# Altium PCB Drude.PcbDoc (part 1 of 2)
Units mil, origin at the board's own origin, x right, y up, seen from the top; angles counter-clockwise.
Board outline 1811.02 x 2874.02 mil, 4 copper layers (Top Layer, GND, Supply, Bottom Layer), stack 59.85 mil thick; 137 components, 118 nets, 574 pads, 296 vias.
Unrouted connection lines stored in the file: 8.
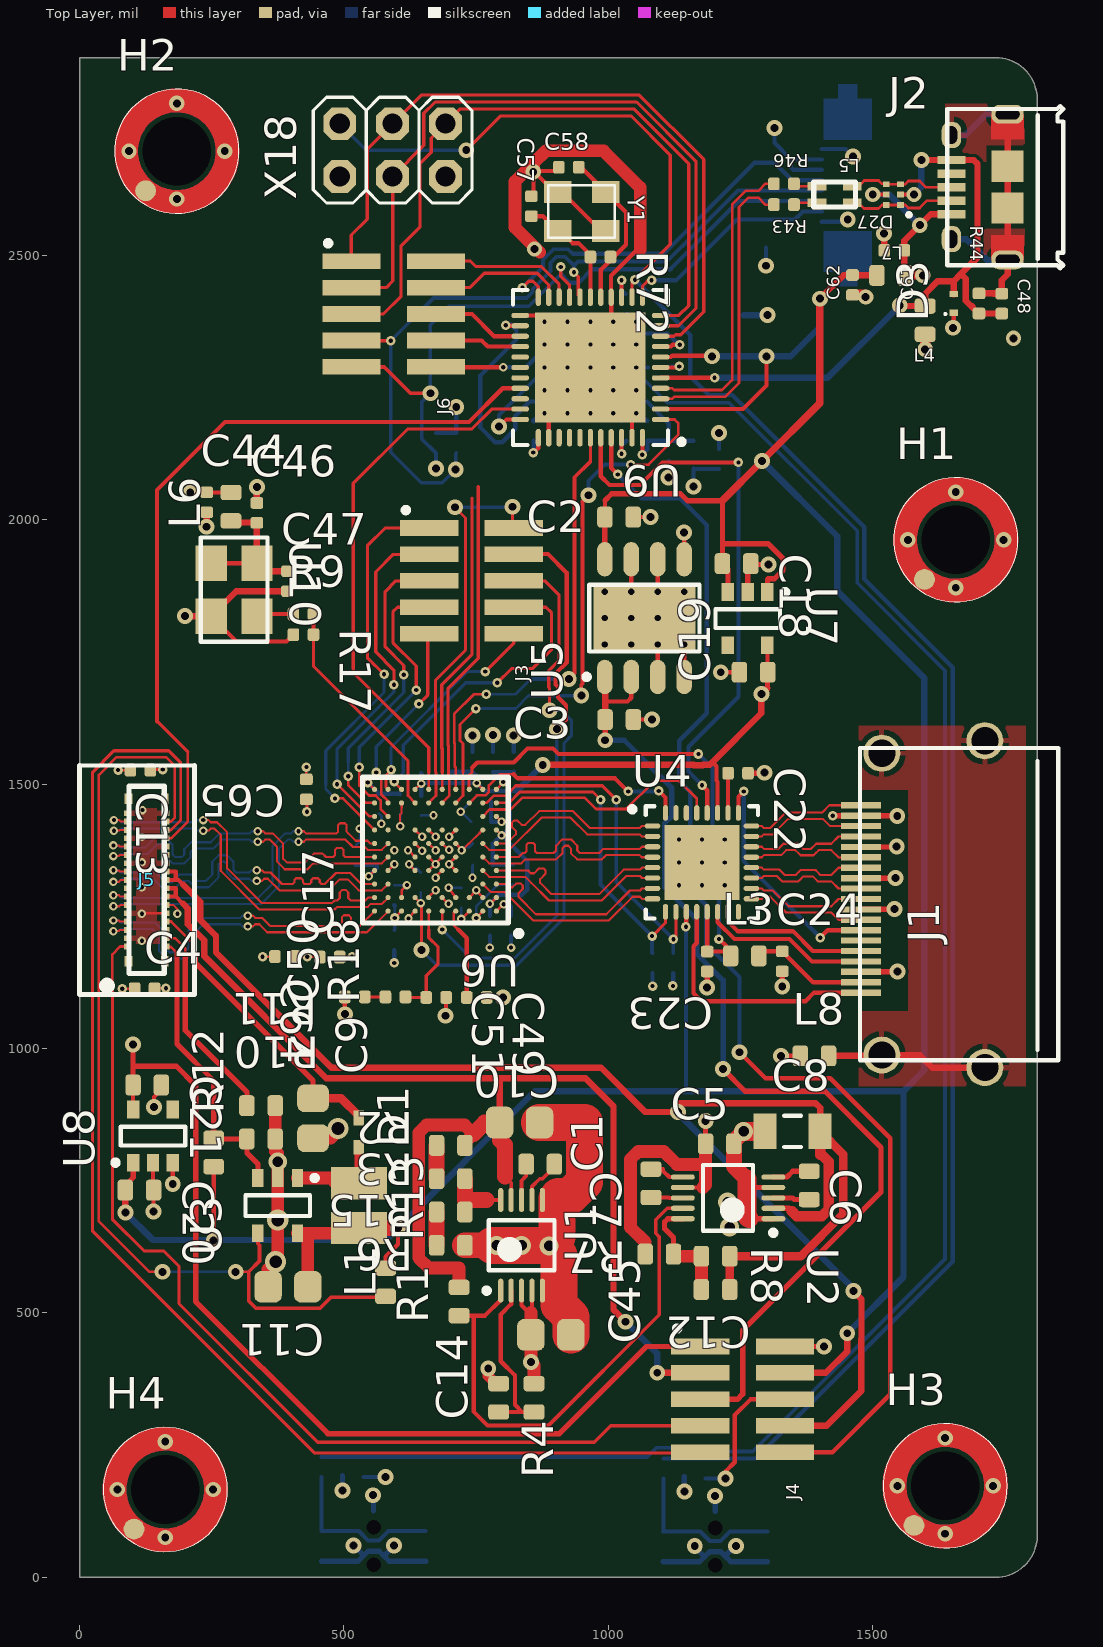
[diagram p0: Top Layer view]
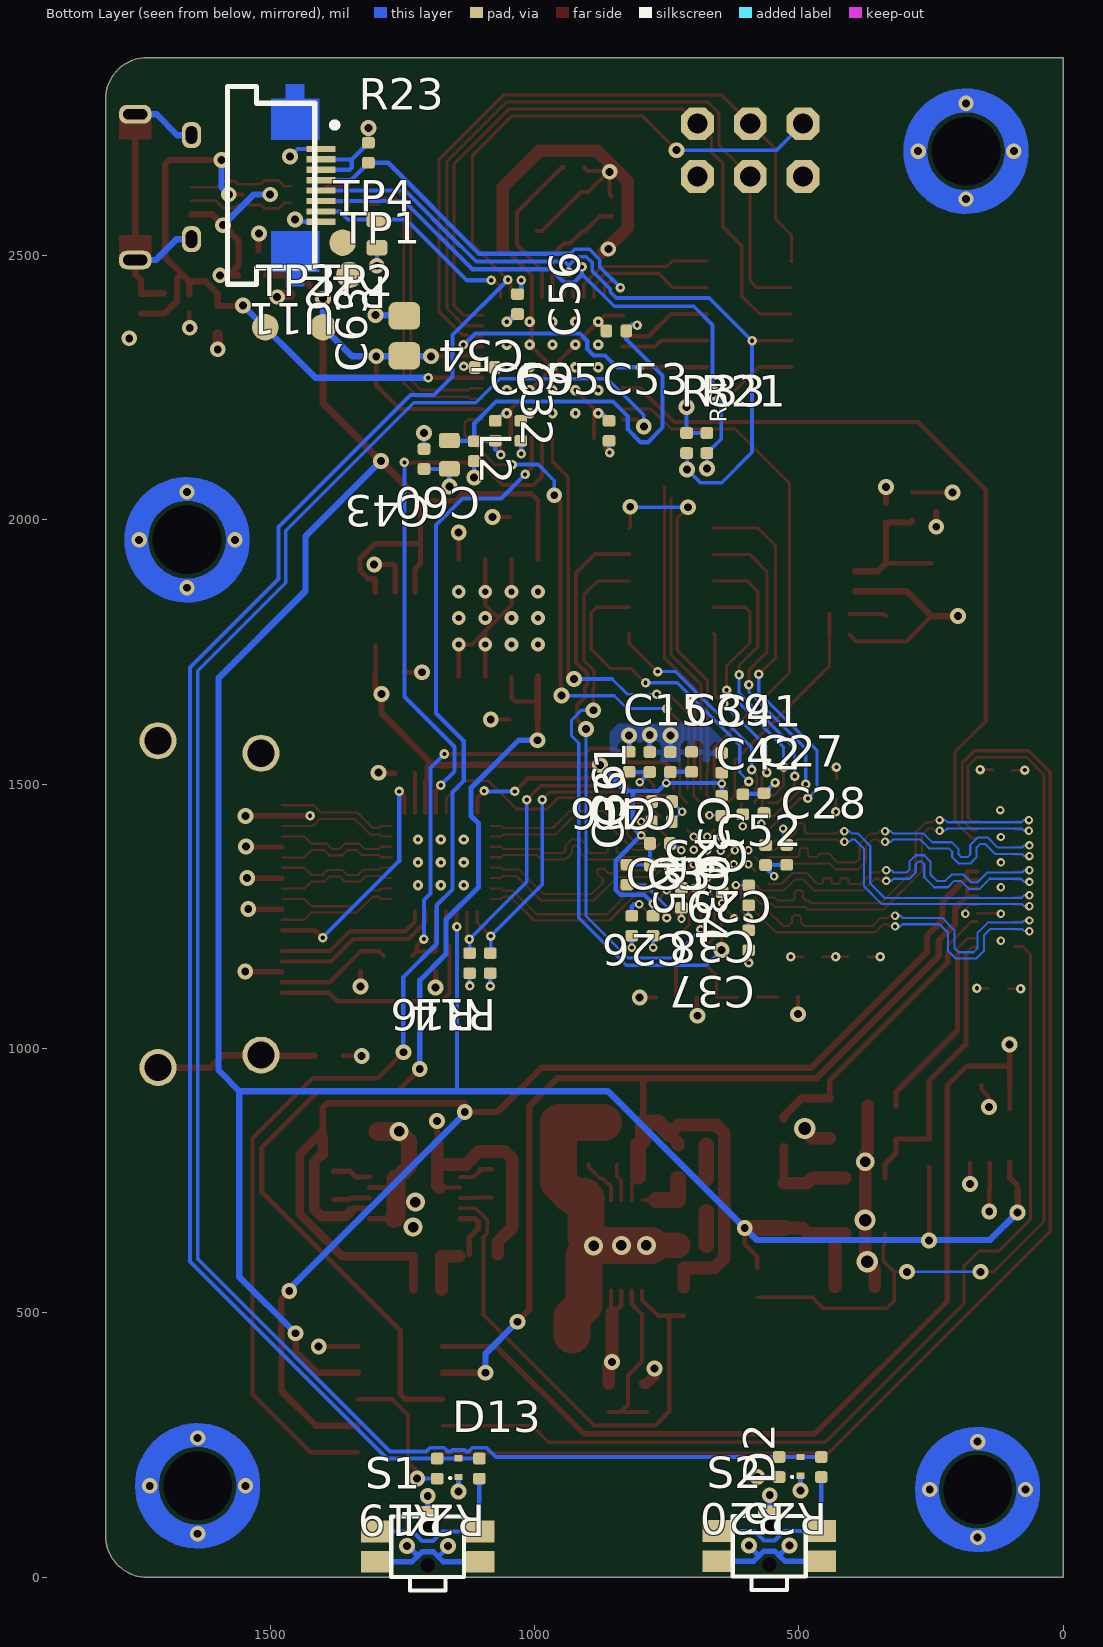
[diagram p1: Bottom Layer view, seen from below]
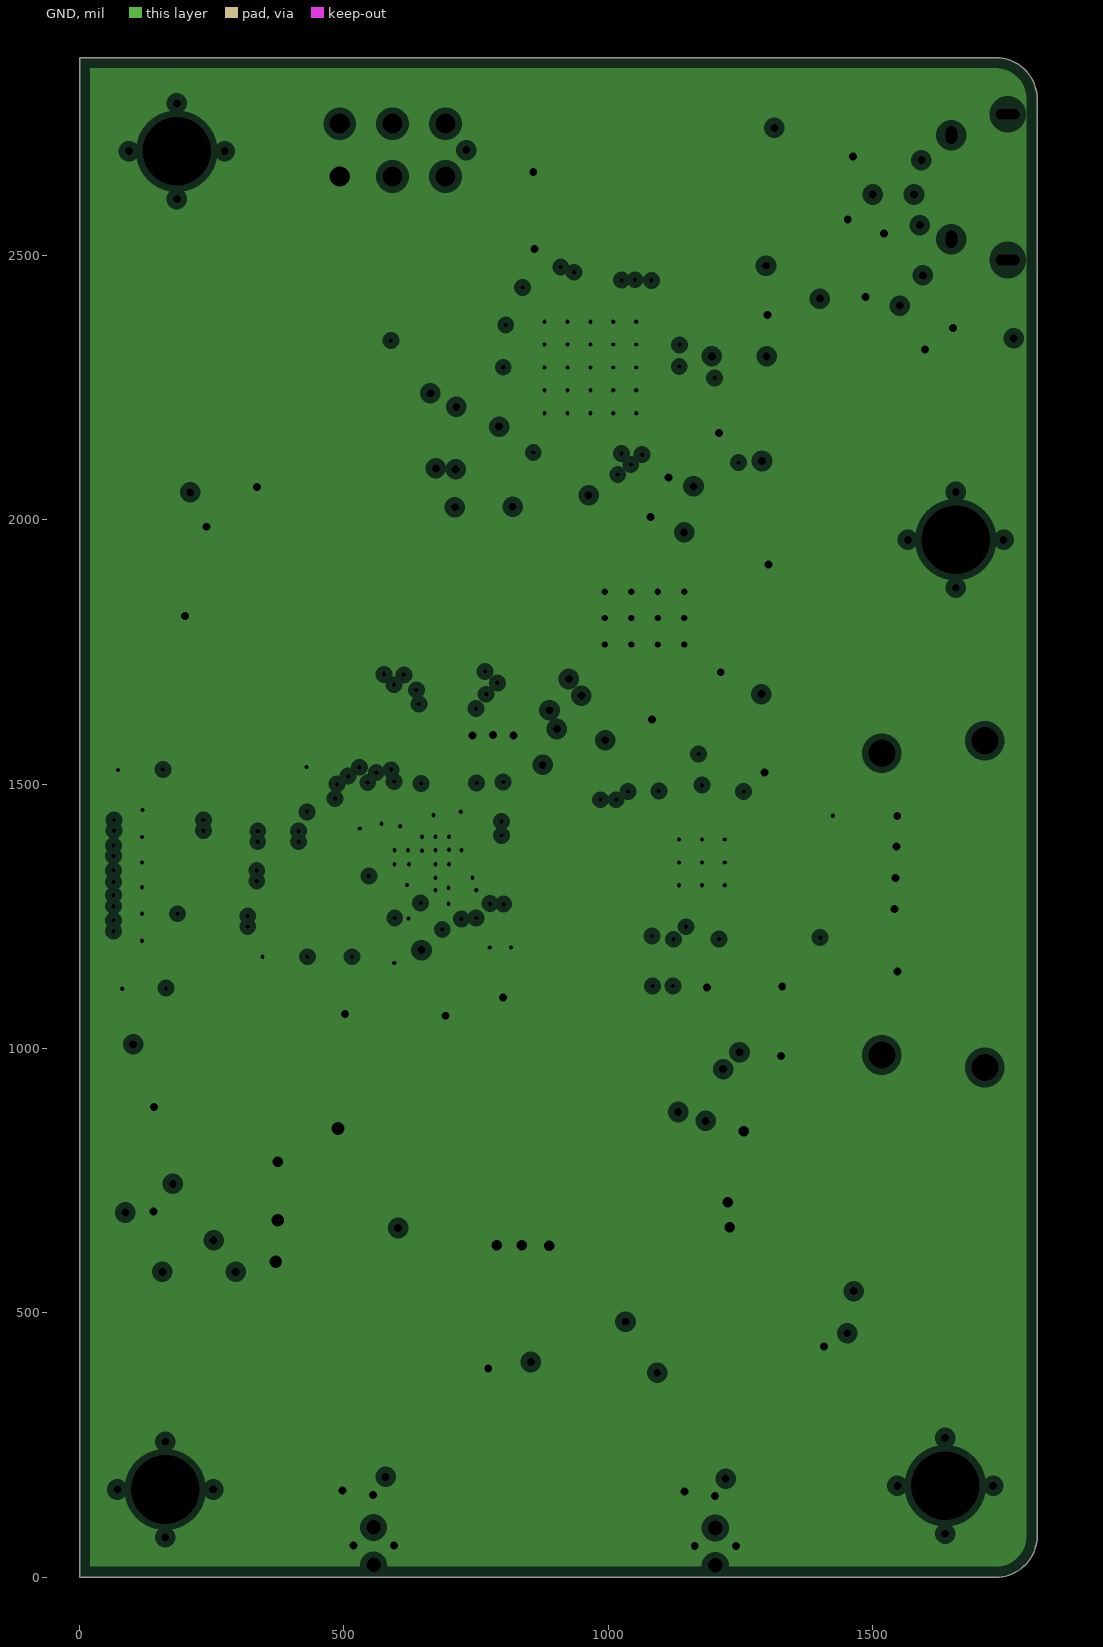
[diagram p2: GND, clearances drawn from the general rule]
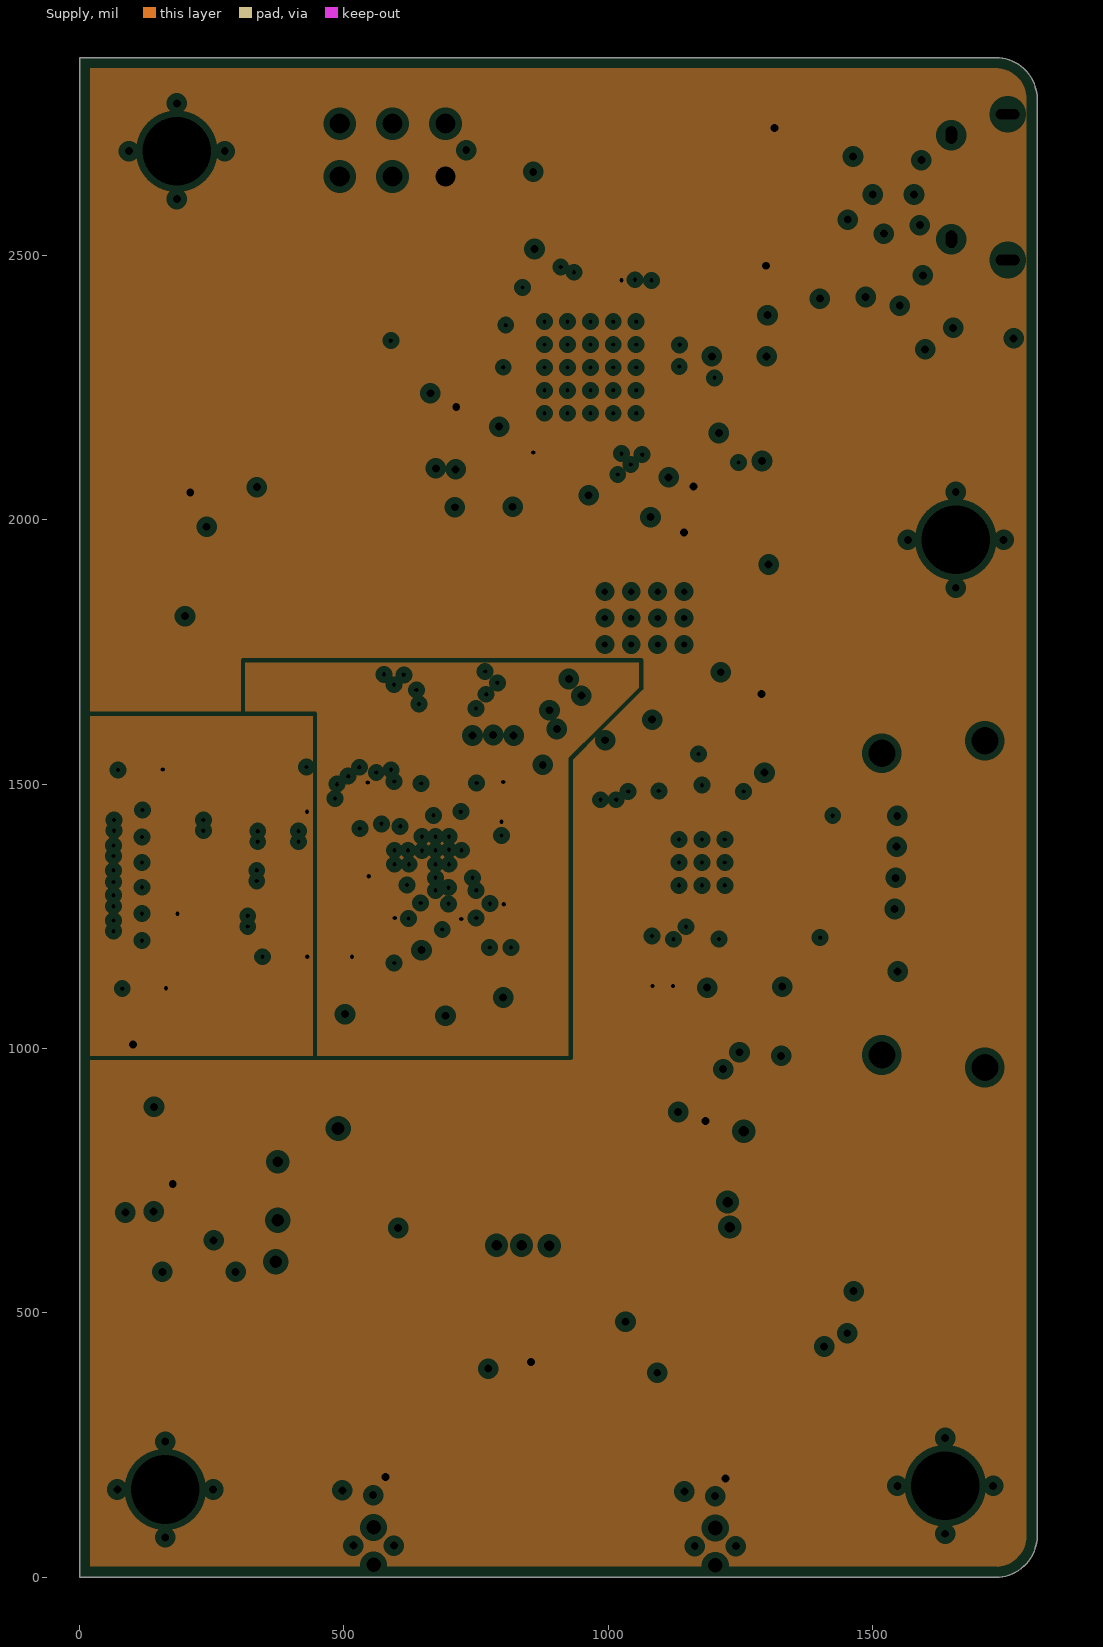
[diagram p3: Supply, clearances drawn from the general rule]

## Layer stack, top to bottom
Top Solder: solder mask 0.4, Solder Resist, Dk 3.5
Top Layer: signal copper 1.4
Dielectric 1: prepreg 3.5, FR-4 TG170, Dk 4.6
GND: plane copper 1.4, net GND
Dielectric 3: core 47.25, FR-4 TG170, Dk 4.6
Supply: plane copper 1.4, net (Multiple Nets)
Dielectric 2: prepreg 3.5, FR-4 TG170, Dk 4.6
Bottom Layer: signal copper 1.4
Bottom Solder: solder mask 0.4, Solder Resist, Dk 3.5

## Board outline
0,0 0,2874.02 1732.28,2874.02 cw(c1732.28,2795.28) 1811.02,2795.28 1811.02,78.74 cw(c1732.28,78.74) 1732.28,0

## Design rules (kind name [scope] priority, off if disabled: settings)
AcuteAngle [All] p1: minimum=6.00000000000000E+0001 checktracksonly=FALSE
Clearance Clearance_DisplayConn [WithinRoom('RoomDisplayConnector')] p1: gap=4
Clearance Clearance_Rooms [WithinRoom('RoomTC')    or WithinRoom('RoomIP') or WithinRoom('RoomHDMIConn')] p2: gap=4
Clearance Clearance_100rDiff [InNetClass('DSI')  or InNetClass('HDMI')   or InNetClass('HDMI_CONN')] p3: gap=8 except(4: Via-Via)
Clearance Clearance_90rDiff [InNetClass('USB')] p4: gap=8 except(4: Via-Via)
Clearance Clearance_100rDiffOtherNets [InNetClass('DSI')  or InNetClass('HDMI')   or InNetClass('HDMI_CONN')] p5: gap=12
Clearance [All] p6: gap=6
ComponentClearance ComponentClearance_Connectors [InComponentClass('Connectors')] p1: gap=1 collisioncheckmode=3 verticalgap=10 showdistances=FALSE
ComponentClearance [All] p2: gap=10 collisioncheckmode=3 verticalgap=10 showdistances=FALSE
DiffPairsRouting DiffPairsRouting_90r [InNetClass('USB')] p1: maxlimit=8 minlimit=8 mostfreqgap=8 toplayer_minwidth=5 toplayer_maxwidth=5 toplayer_prefwidth=5 bottomlayer_minwidth=5 bottomlayer_maxwidth=5 bottomlayer_prefwidth=5 maxuncoupledlength=78.74
DiffPairsRouting [All] p2: maxlimit=8 minlimit=8 mostfreqgap=8 toplayer_minwidth=4 toplayer_maxwidth=4 toplayer_prefwidth=4 bottomlayer_minwidth=4 bottomlayer_maxwidth=4 bottomlayer_prefwidth=4 maxuncoupledlength=78.74
HoleSize [All] p1: absolutevalues=TRUE maxlimit=100000 minlimit=8 maxpercent=80.000 minpercent=20.000
HoleToHoleClearance [All] p1: gap=8 allowstackedmicrovias=TRUE
MatchedLengths MatchedLengths-DSI [InNetClass('DSI')] p1: tolerance=5 checknetsindiffpair=TRUE checkdiffpairvsdiffpair=TRUE checkothers=TRUE
MatchedLengths MatchedLengths-HDMI [InNetClass('HDMI')] p2: tolerance=5 checknetsindiffpair=TRUE checkdiffpairvsdiffpair=TRUE checkothers=TRUE
MatchedLengths MatchedLengths-HDMI_CONN [InNetClass('HDMI_CONN')] p3: tolerance=5 checknetsindiffpair=TRUE checkdiffpairvsdiffpair=TRUE checkothers=TRUE
MinimumAnnularRing [All] p1: minimumring=4
MinimumSolderMaskSliver [All] p1: minsoldermaskwidth=4
ParallelSegment ParallelSegment_USB_8 [(InDifferentialPairClass('UD')) vs (InDifferentialPairClass('UD'))] p1: limit=3000 gap=8
ParallelSegment ParallelSegment_USB_15 [(InDifferentialPairClass('UD')) vs (InDifferentialPairClass('UD'))] p2: limit=300 gap=8
ParallelSegment ParallelSegment_Lane2 [(InDifferentialPairClass('LANE2')) vs (InDifferentialPairClass('LANE2'))] p3: limit=3000 gap=8
ParallelSegment ParallelSegment_2 [(InDifferentialPairClass('All Differential Pairs'))] p4: limit=500 gap=42
ParallelSegment ParallelSegment_1 [(InDifferentialPairClass('All Differential Pairs'))] p5: limit=7874.02 gap=36
PasteMaskExpansion [All] p1: expansion=-1
PlaneClearance [All] p1: clearance=12
PlaneConnect PowerPlaneConnect [InNet('+12V')] p1: planeconnectstyle=Relief reliefexpansion=20 reliefentries=4 reliefconductorwidth=24 reliefairgap=10
PlaneConnect PlaneConnect_Via [IsVia] p2: planeconnectstyle=Direct reliefexpansion=20 reliefentries=4 reliefconductorwidth=10 reliefairgap=10
PlaneConnect [All] p3: planeconnectstyle=Relief reliefexpansion=20 reliefentries=4 reliefconductorwidth=10 reliefairgap=10
PolygonConnect ThermalVias [IsVia] p1: connectstyle=Direct reliefconductorwidth=10 reliefentries=4 polygonreliefangle="90 Angle" airgapwidth=10
PolygonConnect PolygonConnect_no_connect [InNet('+12V2') and OnLayer('Top')  and InComponent('F2')] p2: connectstyle=NoConnect reliefconductorwidth=24 reliefentries=4 polygonreliefangle="90 Angle" airgapwidth=10
PolygonConnect "Direct Connect" [InComponent('R13')  Or InComponent('D9') Or InComponent('L1') Or InComponent('C45') Or InComponent('U3') Or InComponent('C35') Or InComponent('R24') Or InComponent('D2') Or InComponent('D7') Or InComponent('D8') Or InComponent('Q1') Or InComponent('Q5') Or InComponent('D6') Or InComponent('D10') Or InComponent('C40')     Or InComponent('D8')  Or InComponent('F5')] p3: connectstyle=Direct reliefconductorwidth=10 reliefentries=4 polygonreliefangle="90 Angle" airgapwidth=10
PolygonConnect "PolygonConnect_24 mil" [InNet('NetD6_A') OR  InNet('+12V2') OR InComponent('C54')    OR InComponent('Q8') OR InNet('PWR-IN')] p4: connectstyle=Relief reliefconductorwidth=24 reliefentries=4 polygonreliefangle="90 Angle" airgapwidth=10
PolygonConnect "PolygonConnect_Bot 50mil" [InNet('+12V3') Or InNet('NetF3_1') Or InComponent('X10') vs OnLayer('Bottom')] p5: connectstyle=Relief reliefconductorwidth=50 reliefentries=4 polygonreliefangle="90 Angle" airgapwidth=10
PolygonConnect PolygonConnect_50mil [InNet('Netd10_a')] p6: connectstyle=Relief reliefconductorwidth=50 reliefentries=4 polygonreliefangle="90 Angle" airgapwidth=10
PolygonConnect PolygonConnect_Fets_12V-INbot [InNet('12V-IN')] p7: connectstyle=Relief reliefconductorwidth=24 reliefentries=4 polygonreliefangle="90 Angle" airgapwidth=10
PolygonConnect [All] p8: connectstyle=Relief reliefconductorwidth=10 reliefentries=4 polygonreliefangle="90 Angle" airgapwidth=10
RoomDefinition RoomTC [InComponentClass('Components Class 1')] p1: confinementstyle=ConfineIn formatcopy=TRUE lockcomponents=FALSE outline 524,1522 821,1522 821,1411.42 856.3,1411.42 856.3,1225 524,1225
RoomDefinition RoomHDMIConn [InComponentClass('Components Class 1')] p2: confinementstyle=ConfineOut formatcopy=TRUE lockcomponents=FALSE outline 1412.4,1466.54 1513.78,1466.54 1513.78,1097.44 1412.4,1097.44
RoomDefinition RoomIP [InComponentClass('Components Class 1')] p3: confinementstyle=ConfineOut formatcopy=TRUE lockcomponents=FALSE outline 1057,1472 1298,1472 1298,1231 1057,1231
RoomDefinition RoomDisplayConnector [Not IsComponent] p4: confinementstyle=ConfineIn formatcopy=TRUE lockcomponents=FALSE outline 44.1,1179.13 44.1,1520.67 195.87,1520.67 195.87,1179.13
RoutingCorners RoutingCorners_DSI [InNetClass('DSI')] p2: cornerstyle=Round minsetback=100 maxsetback=100
RoutingVias RoutingVias_DSI [InNetClass('DSI')] p1: holewidth=8 width=16 viastyle="Through Hole" minholewidth=8 minwidth=16 maxholewidth=8 maxwidth=16
RoutingVias [All] p2: holewidth=15 width=30 viastyle="Through Hole" minholewidth=8 minwidth=16 maxholewidth=28 maxwidth=50
SMDEntry [0=1] p1: side=TRUE corner=TRUE anyangle=FALSE
SMDToCorner [All] p1: distance=30000
SilkToSilkClearance [All] p1 off: silktosilkclearance=10
SilkToSolderMaskClearance [IsPad] p1 off: minsilkscreentomaskgap=10 clearancetoexposedcopper=TRUE
SolderMaskExpansion ViaTent [(IsVia)  And (HoleDiameter < 0.635   )] p1: expansion=-50
SolderMaskExpansion SolderMaskExpansion_Via [IsVia] p2: expansion=-16
SolderMaskExpansion [All] p3: expansion=3
Width Width_RoomTC [WithinRoom('RoomTC')] p1: maxlimit=20 minlimit=4 preferedwidth=8 toplayer_maxwidth=5 toplayer_prefwidth=5 minimp=50.000000 maximp=50.000000 favimp=50.000000
Width Width_100rDiff [InNetClass('DSI')  or InNetClass('HDMI')   or InNetClass('HDMI_CONN')] p2: maxlimit=5.7 minlimit=4 preferedwidth=5.7 minimp=50.000000 maximp=50.000000 favimp=50.000000
Width Width_90rDiff [InNetClass('USB')] p3: maxlimit=5 minlimit=5 preferedwidth=5 minimp=50.000000 maximp=50.000000 favimp=50.000000
Width Width_DisplayConn [WithinRoom('RoomDisplayConnector')] p4: maxlimit=8 minlimit=4 preferedwidth=5 minimp=50.000000 maximp=50.000000 favimp=50.000000
Width [All] p5: maxlimit=100 minlimit=5 preferedwidth=8 minimp=50.000000 maximp=50.000000 favimp=50.000000
20 further rules are at their usual default settings.

## Classes and differential pairs
net class HDMI_CONN: HDMI_CON_CK_N HDMI_CON_CK_P HDMI_CON_D0_N HDMI_CON_D0_P HDMI_CON_D1_N HDMI_CON_D1_P HDMI_CON_D2_N HDMI_CON_D2_P
component class DrudePower: C1 C2 C3 C5 C6 C7 C8 C9 C10 C11 C12 C14 C15 C16 C18 C19 C20 C21 C25 C26 C27 C28 C29 C30 C31 C33 C34 C35 C36 C37 C38 C39 C40 C41 C42 C45 D1 H1 H2 H3 H4 L1 R1 R2 R3 R4 R5 R6 R7 R8 R10 R11 R12 R13 R15 U1 U2 U3 U5 U6 U7 U8
component class LCD-Touch: C4 C13 C17 C64 C65 J4 J5 R22 R23 U11
component class MCU: C32 C43 C48 C53 C54 C55 C56 C57 C58 C59 C60 C61 C62 C63 D2 D3 D13 D27 J2 J6 L2 L4 L5 L7 R19 R20 R21 R24 R25 R33 R43 R44 R46 R72 S1 S2 TP1 TP2 TP3 TP4 U9 X18 Y1
component class HDMI: C22 C23 C24 J1 L3 L8 R14 R16 U4
net class HDMI: HDMI_CK_N HDMI_CK_P HDMI_D0_N HDMI_D0_P HDMI_D1_N HDMI_D1_P HDMI_D2_N HDMI_D2_P
component class TC358779XBG: C44 C46 C47 C49 C50 C51 C52 J3 L6 R9 R17 R18 U10
net class DSI: DSI_CLK_N DSI_CLK_P LANE0_N LANE0_P LANE1_N LANE1_P LANE2_N LANE2_P LANE3_N LANE3_P
net class USB: UC_N UC_P UD_N UD_P
differential pair DSI_CLK: +DSI_CLK_P -DSI_CLK_N
differential pair LANE0: +LANE0_P -LANE0_N
differential pair LANE1: +LANE1_P -LANE1_N
differential pair LANE2: +LANE2_P -LANE2_N
differential pair LANE3: +LANE3_P -LANE3_N
differential pair HDMI_CK: +HDMI_CK_P -HDMI_CK_N
differential pair HDMI_D0: +HDMI_D0_P -HDMI_D0_N
differential pair HDMI_D1: +HDMI_D1_P -HDMI_D1_N
differential pair HDMI_D2: +HDMI_D2_P -HDMI_D2_N
differential pair HDMI_CON_CK: +HDMI_CON_CK_P -HDMI_CON_CK_N
differential pair HDMI_CON_D0: +HDMI_CON_D0_P -HDMI_CON_D0_N
differential pair HDMI_CON_D1: +HDMI_CON_D1_P -HDMI_CON_D1_N
differential pair HDMI_CON_D2: +HDMI_CON_D2_P -HDMI_CON_D2_N
differential pair UC: +UC_P -UC_N
differential pair UD: +UD_P -UD_N

## Components (designator, comment, footprint, x,y, rotation, side; value= is the part's Value field where it differs from the comment)
C1 "330nF" C0603 871.26,781.42 r180 top
C2 "1uF" C0603 1020.32,2005 r0 top
C3 "1uF" C0603 1020.67,1622.05 r0 top
C4 "100nF" C0402 123.03,1113.19 r180 top
C5 "1uF" C0603 1210.63,819.88 r0 top
C6 "100nF" C0603 1379.92,741.14 r90 top
C7 "100nF" C0603 1080.71,745.08 r90 top
C8 "4.7uF" C1206 1348.43,843.5 r180 top
C9 "1uF" C0805 441.64,868.35 r270 top
C10 "10uF" C0805 831.89,860.16 r0 top
C11 "10uF" C0805 394.39,549.46 r180 top
C12 "" C0603 1202.76,544.29 r0 top
C13 "100nF" C0402 115.16,1526.57 r180 top
C14 "100nF" C0603 792.52,339.49 r90 top
C15 "100nF" C0402 821,1542 r90 bottom
C16 "10nF" C0402 782,1542 r270 bottom
C17 "100nF" C0402 473.06,1173.02 r0 top
C18 "1uF" C0603 1242.48,1916.99 r0 top
C19 "1uF" C0603 1274.61,1711.61 r180 top
C20 "1uF" C0603 113.19,732.28 r0 top
C21 "1uF" C0603 127.95,931.1 r0 top
C22 "100nF" C0402 1245.08,1520.67 r0 top
C23 "1uF" C0402 1186.87,1164.76 r270 top
C24 "10nF" C0402 1328.87,1164.76 r90 top
C25 "100nF" C0402 606,1462 r270 bottom
C26 "10nF" C0402 722,1285 r270 bottom
C27 "10nF" C0402 566,1464 r90 bottom
C28 "100nF" C0402 523,1366 r90 bottom
C29 "10nF" C0402 562.99,1366.01 r270 bottom
C30 "100nF" C0402 759.01,1467 r180 bottom
C31 "10nF" C0402 759,1429 r0 bottom
C32 "1uF" C0402 1094,2288 r180 bottom
C33 "10nF" C0402 816,1232 r90 bottom
C34 "100nF" C0402 763,1347 r180 bottom
C35 "10nF" C0402 776,1232 r90 bottom
C36 "10nF" C0402 762.57,1387.8 r0 bottom
C37 "100nF" C0402 595,1205 r270 bottom
C38 "10nF" C0402 595,1290 r270 bottom
C39 "100nF" C0402 703,1542 r90 bottom
C40 "10nF" C0402 743,1542 r270 bottom
C41 "100nF" C0402 646,1540 r90 bottom
C42 "10nF" C0402 646,1459 r90 bottom
C43 "10nF" C0402 1209,2115 r270 bottom
C44 "10nF" C0402 240.3,2032.74 r90 top
C45 "10uF" C0805 890.94,458.58 r0 top
C46 "1uF" C0402 335.3,2012.74 r90 top
C47 "10nF" C0402 393.3,1883.74 r90 top
C48 "4.7nF" C0402 1744,2409 r270 top
C49 "100nF" C0402 750.98,1096.61 r0 top
C50 "C0402TBD" C0402 520.67,1097.6 r180 top
C51 "100nF" C0402 674.21,1096.61 r0 top
C52 "100nF" C0402 645,1314 r90 bottom
C53 "100nF" C0402 859,2168 r90 bottom
C54 "100nF" C0402 1032,2408 r270 bottom
C55 "100nF" C0402 1026,2168 r90 bottom
C56 "100nF" C0402 845,2357 r0 bottom
C57 "22pF" C0402 854.46,2592.78 r90 top
C58 "22pF" C0402 925.33,2666.6 r180 top
C59 "100nF" C0402 1074,2168 r90 bottom
C60 "1uF" C0402 1114,2130 r270 bottom
C61 "10nF" C0402 1540.67,2509.39 r0 top
C62 "1uF" C0402 1461.67,2444.14 r270 top
C63 "10uF" C0805 1246.06,2347.44 r90 bottom
C64 "100nF" C0402 388.41,1174 r180 top
C65 "100nF" C0402 429,1490 r90 top
D1 "BAT54" SOD523 528.25,840.8 r270 top
D2 "ESD9B3.3ST5G" SOD923-100X40-2N 497.05,209.65 r90 bottom
D3 "ESD9B3.3ST5G" SOD923-100X40-2N 1653,2409 r90 top
D13 "ESD9B3.3ST5G" SOD923-100X40-2N 1143.7,207.68 r90 bottom
D27 "PRTR5V0U2F" SOT886 1539,2615 r90 top
H1 "Standoff" Standoff3mmTopConn 1657,1962 r0 top
H2 "Standoff" Standoff3mmTopConn 184,2697 r0 top
H3 "Standoff" Standoff3mmTopConn 1637,173 r0 top
H4 "Standoff" Standoff3mmTopConn 162,166 r0 top
J1 "10029449-111RLF" 10029449-111RLF 1712,1273 r90 top
J2 "USB Micro" 10118194-0001LF 1755,2629 r90 top
J3 "20021121-00010C4LF" FTSH-105-XX-X-DV 741,1884.43 r90 top
J4 "20021121-00010C4LF" FTSH-105-XX-X-DV 1253.94,336.61 r90 top
J5 "LS050T1SX10" 504248-3410 126.77,1318.9 r90 top
J6 "20021121-00010C4LF" FTSH-105-XX-X-DV 594,2389 r90 top
L1 "10uH" INDP3027X15L 528.25,703 r90 top
L2 "MPZ1608S221A" C0603 1161,2123 r270 bottom
L3 "MPZ1608S221A" C0603 1257.87,1175.2 r0 top
L4 "MPZ1608S221A" C0603 1599,2377.31 r90 top
L5 "DLW21HN900SQ2L" DLW21HN900SQ2L 1428,2615 r0 top
L6 "MPZ1608S221A" C0603 286.3,2024.74 r90 top
L7 "MPZ1608S221A" C0603 1534.67,2462.14 r0 top
L8 "MPZ1608S221A" C0603 1389.76,986.22 r0 top
R1 "100K" R0603 717.72,521.57 r90 top
R2 "" R0603 701.97,816.85 r180 top
R3 "" R0603 701.97,753.86 r180 top
R4 "4.7K" R0603 859.45,339.49 r270 top
R5 "2K" R0402 825,1329 r270 bottom
R6 "" R0603 701.97,627.87 r180 top
R7 "" R0603 1096.46,611.22 r0 top
R8 "" R0603 1202.76,607.28 r180 top
R9 "R0402TBD" R0402 423.3,1821.74 r0 top
R10 "" R0603 253.65,803.39 r270 top
R11 "" R0603 343.21,891.98 r0 top
R12 "" R0603 343.21,828.98 r0 top
R13 "" R0603 578.74,558.07 r270 top
R14 "R0402TBD" R0402 1083.66,1161.42 r270 bottom
R15 "" R0603 701.97,690.87 r180 top
R16 "R0402TBD" R0402 1122.68,1161.42 r270 bottom
R17 "R0402TBD" R0402 423.3,1782.74 r0 top
R18 "R0402TBD" R0402 597.44,1097.6 r180 top
R19 "10K" R0402 1184.06,205.71 r270 bottom
R20 "10K" R0402 537.4,208.66 r270 bottom
R21 "1k" R0402 674,2145 r90 bottom
R22 "3.3K" R0603 1298,2541 r270 bottom
R23 "10K" R0402 1314,2694 r90 bottom
R24 "1k" R0402 1104.33,205.71 r270 bottom
R25 "1k" R0402 457.68,208.66 r270 bottom
R33 "1k" R0402 712.39,2145 r90 bottom
R43 "22r" R0402 1332,2596 r0 top
R44 "1M" R0402 1701,2409 r90 top
R46 "22r" R0402 1332,2635.19 r0 top
R72 "1M" R0402 985,2497 r0 top
S1 "PTS840 GKP SMTR LFS" "PTS840 GKP SMTR LFS" 1202,57.89 r180 bottom
S2 "PTS840 GKP SMTR LFS" "PTS840 GKP SMTR LFS" 556,58.89 r180 bottom
TP1 "TestPoint" TP1-27 1350,2463 r90 bottom
TP2 "TestPoint" TP1-27 1400,2364 r90 bottom
TP3 "TestPoint" TP1-27 1509,2364 r90 bottom
TP4 "TestPoint" TP1-27 1363,2524 r90 bottom
U1 "MAX1759" TSSOP50P490X109-10L 835.83,627.87 r90 top
U2 "MAX868" TSSOP50P490X109-10L 1226.38,717.52 r180 top
U3 "FAN5333A" SOT95P270X145-5L 374.71,703 r270 top
U4 "IP4787CZ32Y" QFN32-HVQFN32 1177,1352 r0 top
U5 "BD12IA5WEFJ-E2" TSOP-HTSOP-J8-127P600X100_HS-9M 1068.32,1814 r90 top
U6 "TC358779" BGA80-0707-065 673,1375 r180 top
U7 "AP2127K-3.3" SOT23-5P285X140-5L 1263.48,1812.99 r270 top
U8 "AP2127K-1.8" SOT23-5P285X140-5L 138.87,834.39 r90 top
U9 "ATmega32U4-MU" 44PW_L 966,2288 r180 top
U10 "ASFL1-27.000MHZ-EK-T" OSC-5x3.2x1.3 292.3,1867.74 r270 top
U11 "TP2053CA050C" FFC8x05-top 1482.28,2632.28 r270 bottom
X18 "PINHD-2X3" 2X03 592,2699 r180 top
Y1 "7M-16.000MEEQ-T" CRYS320250 949.25,2582.56 r0 top

## Footprints (in the part's own frame and the unit in brackets; to place one, negate y for a bottom-side part, rotate by r counter-clockwise, add the part's x,y. Pads: shape width x height; smd on the part's side, far side on the other; paste and mask are expansions set on the pad)
2X03 [mil]
  oct 62x62 hole 38: 1(-100,-50) 2(-100,50) 3(0,-50) 4(0,50) 5(100,-50) 6(100,50)
  silkscreen extent -150,-100 150,100, body extent -153,-103 153,103, height 336
44PW_L [mm] "QFN, 44-Leads, Body 7x7mm, Pitch 0.5mm, Thermal Pad 5.3x5.3mm, IPC High Density"
  oval 0.85x0.25 smd: 1(-3.375,2.5) 2(-3.375,2) 3(-3.375,1.5) 4(-3.375,1) 5(-3.375,0.5) 6(-3.375,0) 7(-3.375,-0.5) 8(-3.375,-1) 9(-3.375,-1.5) 10(-3.375,-2) 11(-3.375,-2.5) 23(3.375,-2.5) 24(3.375,-2) 25(3.375,-1.5) 26(3.375,-1) 27(3.375,-0.5) 28(3.375,0) 29(3.375,0.5) 30(3.375,1) 31(3.375,1.5) 32(3.375,2) 33(3.375,2.5)
  oval 0.25x0.85 smd: 12(-2.5,-3.375) 13(-2,-3.375) 14(-1.5,-3.375) 15(-1,-3.375) 16(-0.5,-3.375) 17(0,-3.375) 18(0.5,-3.375) 19(1,-3.375) 20(1.5,-3.375) 21(2,-3.375) 22(2.5,-3.375) 34(2.5,3.375) 35(2,3.375) 36(1.5,3.375) 37(1,3.375) 38(0.5,3.375) 39(0,3.375) 40(-0.5,3.375) 41(-1,3.375) 42(-1.5,3.375) 43(-2,3.375) 44(-2.5,3.375)
  rect 5.3x5.3 smd: 45(0,0)
  silkscreen extent -4.5,-3.73 3.73,3.72, body extent -3.57,-3.57 3.57,3.57, height 0.9
504248-3410 [mm]
  rect 0.28x0.35 smd: 1(-3.2,0.915) 2(-3.2,-0.915) 3(-2.8,0.915) 4(-2.8,-0.915) 5(-2.4,0.915) 6(-2.4,-0.915) 7(-2,0.915) 8(-2,-0.915) 9(-1.6,0.915) 10(-1.6,-0.915) 11(-1.2,0.915) 12(-1.2,-0.915) 13(-0.8,0.915) 14(-0.8,-0.915) 15(-0.4,0.915) 16(-0.4,-0.915) 17(0,0.915) 18(0,-0.915) 19(0.4,0.915) 20(0.4,-0.915) 21(0.8,0.915) 22(0.8,-0.915) 23(1.2,0.915) 24(1.2,-0.915) 25(1.6,0.915) 26(1.6,-0.915) 27(2,0.915) 28(2,-0.915) 29(2.4,0.915) 30(2.4,-0.915) 31(2.8,0.915) 32(2.8,-0.915) 33(3.2,0.915) 34(3.2,-0.915)
  rect 0.5x0.37 smd: P1(-3.9,0.865) P2(-3.9,-0.865) P2(3.9,-0.865) P3(3.9,0.865)
  silkscreen extent -5.26,-0.85 4.5,2.08, body extent -4.5,-0.85 4.5,0.85, height 0.67
10029449-111RLF [mm]
  rect 0.3x1.9 smd: 1(4.75,5.95) 2(4.25,5.95) 3(3.75,5.95) 4(3.25,5.95) 5(2.75,5.95) 6(2.25,5.95) 7(1.75,5.95) 8(1.25,5.95) 9(0.75,5.95) 10(0.25,5.95) 11(-0.25,5.95) 12(-0.75,5.95) 13(-1.25,5.95) 14(-1.75,5.95) 15(-2.25,5.95) 16(-2.75,5.95) 17(-3.25,5.95) 18(-3.75,5.95) 19(-4.25,5.95)
  round 1.778 hole 1.3: 20(-7.25,4.95) 21(7.25,4.95) 22(-7.85,0) 23(7.85,0)
  silkscreen extent -7.5,-3.52 7.5,6, body extent -7.6,-3.63 7.6,6.1, height 6.18
10118194-0001LF [mm]
  rect 0.4x1.35 smd: 1(-1.3,2.7) 2(-0.65,2.7) 3(0,2.7) 4(0.65,2.7) 5(1.3,2.7)
  rrect80% 0.89x1.55 hole 0.5 slot 1.15 at 90 deg: 6(-3.5,0) 7(3.5,0)
  rrect80% 1.25x0.93 hole 0.55 slot 0.85 at 0 deg: 8(-2.5,2.7) 9(2.5,2.7)
  rect 1.5x1.55 smd: 10(-1,0) 11(1,0)
  Top Layer region: 3.5,-0.775 2.3,-0.775 2.3,0.775 3.5,0.775
  Top Layer region: -3.5,0.775 -2.3,0.775 -2.3,-0.775 -3.5,-0.775
  silkscreen extent -3.9,-2.68 3.9,2.9, body extent -4,-2.78 4,3, height 3
BGA80-0707-065 [mm] "P-VFBGA80-0707-0.65-001"
  round 0.25 smd paste+0 mask+0.055: A1(-2.925,2.925) A2(-2.275,2.925) A3(-1.625,2.925) A4(-0.975,2.925) A5(-0.325,2.925) A6(0.325,2.925) A7(0.975,2.925) A8(1.625,2.925) A9(2.275,2.925) A10(2.925,2.925) B1(-2.925,2.275) B2(-2.275,2.275) B3(-1.625,2.275) B4(-0.975,2.275) B5(-0.325,2.275) B6(0.325,2.275) B7(0.975,2.275) B8(1.625,2.275) B9(2.275,2.275) B10(2.925,2.275) C1(-2.925,1.625) C2(-2.275,1.625) C9(2.275,1.625) C10(2.925,1.625) D1(-2.925,0.975) D2(-2.275,0.975) D4(-0.975,0.975) D5(-0.325,0.975) D6(0.325,0.975) D7(0.975,0.975) D9(2.275,0.975) D10(2.925,0.975) E1(-2.925,0.325) E2(-2.275,0.325) E4(-0.975,0.325) E5(-0.325,0.325) E6(0.325,0.325) E7(0.975,0.325) E9(2.275,0.325) E10(2.925,0.325) F1(-2.925,-0.325) F2(-2.275,-0.325) F4(-0.975,-0.325) F5(-0.325,-0.325) F6(0.325,-0.325) F7(0.975,-0.325) F9(2.275,-0.325) F10(2.925,-0.325) G1(-2.925,-0.975) G2(-2.275,-0.975) G4(-0.975,-0.975) G5(-0.325,-0.975) G6(0.325,-0.975) G7(0.975,-0.975) G9(2.275,-0.975) G10(2.925,-0.975) H1(-2.925,-1.625) H2(-2.275,-1.625) H9(2.275,-1.625) H10(2.925,-1.625) J1(-2.925,-2.275) J2(-2.275,-2.275) J3(-1.625,-2.275) J4(-0.975,-2.275) J5(-0.325,-2.275) J6(0.325,-2.275) J7(0.975,-2.275) J8(1.625,-2.275) J9(2.275,-2.275) J10(2.925,-2.275) K1(-2.925,-2.925) K2(-2.275,-2.925) K3(-1.625,-2.925) K4(-0.975,-2.925) K5(-0.325,-2.925) K6(0.325,-2.925) K7(0.975,-2.925) K8(1.625,-2.925) K9(2.275,-2.925) K10(2.925,-2.925)
  silkscreen extent -4.14,-3.5 3.5,4.14, body extent -3.5,-3.5 3.5,3.5, height 1
C0402 [mil]
  rrect40% 22x24 smd: 1(-18.7,0) 2(19,0)
  body extent -20,-10 20,10, height 20
C0603 [mm]
  rrect40% 0.74x1 smd: 1(-0.68,0) 2(0.68,0)
C0805 [mil]
  rrect50% 52x60 smd: 1(-37.4,0) 2(38,0)
  body extent -40,-30 40,30, height 35
C1206 [mm]
  rect 1.1x1.7 smd: 1(-1.325,0) 2(1.325,0)
  silkscreen extent -0.4,-0.75 0.4,0.75, body extent -1.68,-0.87 1.67,0.88, height 1.6
CRYS320250 [mil]
  rect 52x42 smd: 1(-45.28,-36.42) 2(46,-36.42) 3(46,37) 4(-45.28,37)
  silkscreen extent -63,-49 63,50, body extent -63,-49 63,50, height 28
DLW21HN900SQ2L [mm]
  rect 0.9x0.4 smd: 1(-0.85,0.4) 2(0.85,0.4) 3(0.85,-0.4) 4(-0.85,-0.4)
  silkscreen extent -1,-0.6 1,0.6, body extent -1,-0.6 1,0.6, height 1
FFC8x05-top [mm] "SFV8R-2STE9HLF"
  rect 0.3x1.4 smd: 1(-1.75,2) 2(-1.25,2) 3(-0.75,2) 4(-0.25,2) 5(0.25,2) 6(0.75,2) 7(1.25,2) 8(1.75,2)
  Top Layer region: 4.15,1.9 2.2,1.9 2.2,-0.4 4.15,-0.4 4.15,0.3 4.85,0.3 4.85,1.2 4.15,1.2
  Top Layer region: -4.15,1.9 -2.2,1.9 -2.2,-0.4 -4.15,-0.4 -4.15,0.3 -4.85,0.3 -4.85,1.2 -4.15,1.2
  silkscreen extent -4.75,-2.5 4.75,2.8, body extent -4.75,-2.5 4.75,1.7, height 1.8
FTSH-105-XX-X-DV [mm] "1.27mm pitch, 10 pin, terminal strip; vertical, SMT"
  rect 0.75x2.8 smd: 1(2.54,2.03) 2(2.54,-2.03) 3(1.27,2.03) 4(1.27,-2.03) 5(0,2.03) 6(0,-2.03) 7(-1.27,2.03) 8(-1.27,-2.03) 9(-2.54,2.03) 10(-2.54,-2.03)
  silkscreen extent 3.28,3.03 3.52,3.27
INDP3027X15L [mm] "Precision Wire Wound Inductor, 2-Leads, Body 3.00x2.65mm, IPC High Density"
  rect 1.55x2.7 smd: 1(-1.075,0) 2(1.075,0)
  body extent -1.55,-1.35 1.55,1.35, height 1.5
OSC-5x3.2x1.3 [mm]
  rect 1.7x1.5 smd paste-1.905: 1(-1.27,-1.1) 2(1.27,-1.1) 3(1.27,1.1) 4(-1.27,1.1)
  silkscreen extent -2.5,-1.6 2.5,1.6, body extent -2.5,-1.6 2.5,1.6, height 1.3
"PTS840 GKP SMTR LFS" [mm] "SWITCH TACTILE SPST-NO 0.05A 12V"
  rect 1.4x1.05 smd: 1(-2.5,0.725) 2(2.5,0.725) 3(-2.5,-0.725) 4(2.5,-0.725)
  rect 1.1x0.5 smd paste-2: 5(0,1.7)
  rect 0x0 hole 0.7 paste-1.905: 6(0,0.9) 7(0,-0.9)
  silkscreen extent -1.75,-2.1 1.75,1.45, body extent -1.75,-2.1 1.75,1.45, height 1.35
QFN32-HVQFN32 [mm] "32 terminals; body 5 x 5 x 0.85 mm"
  oval 0.75x0.25 smd: 1(-2.375,1.75) 2(-2.375,1.25) 3(-2.375,0.75) 4(-2.375,0.25) 5(-2.375,-0.25) 6(-2.375,-0.75) 7(-2.375,-1.25) 8(-2.375,-1.75) 17(2.375,-1.75) 18(2.375,-1.25) 19(2.375,-0.75) 20(2.375,-0.25) 21(2.375,0.25) 22(2.375,0.75) 23(2.375,1.25) 24(2.375,1.75)
  oval 0.25x0.75 smd: 9(-1.75,-2.375) 10(-1.25,-2.375) 11(-0.75,-2.375) 12(-0.25,-2.375) 13(0.25,-2.375) 14(0.75,-2.375) 15(1.25,-2.375) 16(1.75,-2.375) 25(1.75,2.375) 26(1.25,2.375) 27(0.75,2.375) 28(0.25,2.375) 29(-0.25,2.375) 30(-0.75,2.375) 31(-1.25,2.375) 32(-1.75,2.375)
  rect 3.6x3.6 smd: 33(0,0)
  silkscreen extent -3.47,-2.7 2.7,2.7, body extent -2.55,-2.55 2.55,2.55, height 0.85
R0402 [mil]
  rrect40% 22x24 smd: 1(-18.9,0) 2(19,0)
  body extent -20,-10 20,10, height 14
R0603 [mm]
  rrect40% 0.74x1 smd: 1(-0.68,0) 2(0.68,0)
  body extent -0.8,-0.4 0.8,0.4, height 0.8
SOD523 [mil]
  rect 28x20 smd: A(27.56,0) C(-27.56,0)
  body extent -30,-16 30,16, height 28
SOD923-100X40-2N [mm] "SODFL, 2-Leads, Body 0.60x1.00mm, IPC Medium Density"
  rect 0.3x0.4 smd paste-0.025: A(0.45,0) C(-0.45,0)
  silkscreen extent -0.55,0.35 -0.45,0.45, body extent -0.42,-0.33 0.43,0.33, height 0.4
SOT23-5P285X140-5L [mm] "SOT26, 6-Leads, Body 3.00x2.85mm, Pitch 0.95mm, IPC High Density"
  rect 0.85x0.6 smd: 1(-1.275,0.95) 2(-1.275,0) 3(-1.275,-0.95) 4(1.275,-0.95) 5(1.275,0.95)
  silkscreen extent -1.4,-1.55 0.45,1.93, body extent -0.85,-1.55 0.85,1.55, height 1.4
SOT95P270X145-5L [mm] "SOT23, 5-Leads, Body 2.90x2.70mm, Pitch 0.95mm, IPC High Density"
  rect 0.85x0.55 smd: 1(-1.325,0.95) 2(-1.325,0) 3(-1.325,-0.95) 4(1.325,-0.95) 5(1.325,0.95)
  silkscreen extent -1.45,-1.55 0.5,1.9, body extent -0.9,-1.55 0.9,1.55, height 1.45
SOT886 [mm]
  rect 0.27x0.325 smd: 1(-0.5,-0.337) 2(0,-0.337) 3(0.5,-0.337) 4(0.5,0.337) 5(0,0.337) 6(-0.5,0.337)
  silkscreen extent -1.05,-0.83 -0.9,-0.67, body extent -0.75,-0.53 0.75,0.53, height 0.54
Standoff3mmTopConn [mm]
  round 1 smd paste-2 mask-2: 1(-1.5,-1.9)
  round 0 hole 3.3 unplated paste-2 mask-3: ""(0,0)
  Top Layer circle w1.143: c0,0 r2.438
  Bottom Layer circle w1.143: c0,0 r2.438
  silkscreen extent -2.98,-2.98 2.98,2.98, body extent -2.99,-2.99 2.99,2.99, height 0.01
TP1-27 [mil]
  rrect100% 50x50 smd: TP(0,0)
  body extent -25,-25 25,25, height 0
TSOP-HTSOP-J8-127P600X100_HS-9M [mm] "TSOP, 8-Leads, Body 5.02x3.90mm, Pitch 1.27mm, Thermal Pad 3.20x2.40mm, IPC Low Density"
  oval 1.65x0.75 smd: 1(-2.825,1.905) 2(-2.825,0.635) 3(-2.825,-0.635) 4(-2.825,-1.905) 5(2.825,-1.905) 6(2.825,-0.635) 7(2.825,0.635) 8(2.825,1.905)
  rect 3.2x4.9 smd: 9(0,0)
  silkscreen extent -2.95,-2.65 1.6,2.9, body extent -2,-2.65 2,2.65, height 1
TSSOP50P490X109-10L [mm] "TSSOP, 10-Leads, Body 3.00x3.00mm, Pitch 0.50mm, IPC High Density"
  oval 1.15x0.25 smd: 1(-2.175,1) 2(-2.175,0.5) 3(-2.175,0) 4(-2.175,-0.5) 5(-2.175,-1) 6(2.175,-1) 7(2.175,-0.5) 8(2.175,0) 9(2.175,0.5) 10(2.175,1)
  silkscreen extent -2.3,-1.58 1.2,1.8, body extent -1.6,-1.6 1.6,1.6, height 1.1

## Part data
C1: library part C1608X7R1H334K080AC, "CAP CER 0603 330nF 50V 10% X7R"
C2 C3 C5 C18 C19 C20 C21: library part CC0603ZRY5V6BB105, "CAP CER 0603 1uF 10V Y5V"
C4 C13 C15 C17 C22 C25 C28 C30 C34 C37 C39 C41 C49 C51 C52 C53 C54 C55 C56 C59 C64 C65: library part GRM155R71C104KA88D, "CAP CER 0402 100nF 16V 10% X7R"
C6 C7 C14: library part C0603C104K5RACTU, "CAP CER 0603 100nF 50V 10% X7R"
C8: library part GRM31CR71H475KA12L, "CAP CER 1206 4.7uF 50V 10% X7R"
C9: library part GRM21BR71H105KA12L, "CAP CER 0805 1uF 50V 10% X7R"
C10 C11 C45 C63: library part C0805C106K8PACTU, "CAP CER 0805 10uF 10V 10% X5R"
C12: library part Capacitor, "Capacitor Non Polarized"
C16 C24 C26 C27 C29 C31 C33 C35 C36 C38 C40 C42 C43 C44 C47 C61: library part GRM155R71H103JA88D, "CAP CER 10nF 50V X7R 0402"
C23 C32 C46 C60 C62: library part GRM155R60J105KE19D, "CAP CER 0402 1uF 6.3V 10% X5R"
C48: library part CC0402KRX7R8BB472, "CAP CER 0402 4.7nF 25V 10% X7R"
C50: "Capacitor Non Polarized"
C57 C58: library part 04025A220JAT2A, "CAP CER 0402 22pF 50V 5% C0G"
D1: library part BAT54XV2, "Diode Schottky 30V 200mA"
D2 D3 D13: "11.5 V 15 pF SMT Transient Voltage Suppressor - SOD-923"
D27: "Rail-to-rail ESD protection devices"
H1 H2 H3 H4: library part Standoff3TopConn, "Mechanical - Top connect"
J1: "CONN HDMI RECPT 19POS SMT R/A"
J2: library part 10118194-0001LF, "Conn Recept USB - micro B 2.0 5 Pos SMT, Rt Angle, Horizontal"
J3 J4 J6: library part "ARM Cortex JTAG-DEBUG Header"
J5: "LCD Module connector"
L1: library part SRN3015-100M, "Ind 10uH 1A"
L2 L3 L4 L6 L7 L8: "Ferrite"
L5: "Common Mode Chokes Dual 90Ohm 100MHz 330mA 350mOhm DCR SMD"
R1: library part RC0603FR-07100KL, "RES 100K OHM 1/10W 1% 0603 SMD"
R2 R3 R6 R7 R8 R10 R11 R12 R13 R15: library part Resistor, "Resistor"
R4: library part ERJ3EKF4701V, "RES 0603 4.7K 100mW 1%"
R5: library part RC0402FR-072KL, "RES SMD 2K OHM 1% 1/16W 0402"
R9 R14 R16 R17 R18: "Resistor"
R19 R20 R23: library part RC0402FR-0710KP, "RES SMD 10K OHM 1% 1/16W 0402"
R21 R24 R25 R33: library part RK73H1ETTP1001F, "RES 0402 1k 63mW 1%"
R22: library part ERJ-3GEYJ332V, "RES 0603 3.3K 100mW 1%"
R43 R46: library part RC0402FR-0722RL, "RES 0402 22r 63mW 1%"
R44 R72: library part ERJ2GEJ105X, "RES 0402 1M 100mW 5%"
S1 S2: "SWITCH TACTILE SPST-NO 0.05A 12V"
TP1 TP2 TP3 TP4: "Test Point"
U1: "Buck/Boost Regulating Charge Pump"
U2: "Regulated -2x Inverting Charge Pump"
U3: library part FAN5333, "LED Driver w/ integrated switch"
U4: "IC DVI/HDMI ESD PROTECT 32HVQFN"
U5: "LDO Regulator 500mA 1.2V"
U7: library part AP2127K-3.3TRG1, "LDO 3.3V 0.3A SOT25"
U8: library part AP2127K-1.8TRG1, "LDO 1.8V 0.3A SOT25"
U9: library part MC-8B-ATM16U4-SQ45
U10: "OSC XO 27.000MHZ HCMOS TTL SMD"
U11: "UltiMachine 5\" HD Touch Interface"
X18: "PIN HEADER"
Y1: "Crystal 16mHz 10ppm 10pF"

## Via types
v1: diameter 30, hole 15, Top Layer to Bottom Layer, tented both sides, 88 vias
v2: diameter 16, hole 8, Top Layer to Bottom Layer, tented both sides, 66 vias
v3: diameter 18, hole 8, Top Layer to Bottom Layer, tented both sides, 62 vias
v4: diameter 19.68, hole 8, Top Layer to Bottom Layer, 34 vias
v5: diameter 29, hole 15, Top Layer to Bottom Layer, tented both sides, 24 vias
v6: diameter 26, hole 11.81, Top Layer to Bottom Layer, 12 vias
v7: diameter 36, hole 20, Top Layer to Bottom Layer, tented both sides, 6 vias
v8: diameter 40, hole 24, Top Layer to Bottom Layer, tented both sides, 3 vias
v9: diameter 35, hole 20, Top Layer to Bottom Layer, tented both sides, 1 vias

## Nets (pads, with @x,y where several pads share a name; then routed paths per layer and width w, separated by ;. In a path a pad name is that pad's centre, name@x,y a point inside that pad or via, vN(x,y) a via of type N, cw(c..) or ccw(c..) an arc to the next point about the centre after c; other vN are vias at no path point)
1.2V: C3.1 C15.1 C16.2 C17.2 C25.1 C26.2 C27.2 C28.1 C29.2 C30.1 C31.2 C33.2 C37.1 C38.2 J4.5 U5.1 U5.2 U6.A1 U6.A3 U6.A8 U6.D10 U6.H1 U6.K1 U6.K10 | length 2502.9
  Top Layer w5: C17.2@492.06,1173.51 v3(515.38,1173.51) ; v3(545,1503) U6.K10@557.84,1490.16 ; v2(547,1326) 547.23,1326 U6.D10@557.84,1336.61 ; v3(596,1247) 596.18,1247 U6.A8@609.02,1259.84 ; v2(722,1245) 722.13,1245 U6.A3@736.98,1259.84 ; U6.A1@788.16,1259.84 802,1273.68 v2(802,1273) ; U6.H1@788.16,1438.98 798,1429.13 v2(798,1429) ; U6.K1@788.16,1490.16 801.02,1503.02 v2(801.02,1504)
  Top Layer w8: 993.9,1656.5 1036.42,1656.5 1043.32,1663.39 U5.2@1043.32,1702.78
  Top Layer w10: C3.1@993.9,1622.05 993.9,1577.95 994,1578.06 v1(994,1583) ; J4.5@1174.02,336.61 1244.09,336.61 1253.94,346.46 1253.94,466.54 1515.75,728.35 1515.75,812.99 1409.45,919.29 1258.71,919.29 v1(1217,961)
  Top Layer w12: U5.1@993.32,1702.78 993.9,1702.2 993.9,1656.5 C3.1@993.9,1622.05
  Bottom Layer w5: v3@596,1238.06 v3(596,1247) C38.2@596,1270 ; v2(722,1245) C26.2@722,1266 ; C31.2@778,1429 C31.2@779,1430
  Bottom Layer w7: C37.1@595,1223.7 596,1224.7 v3@596,1238.06
  Bottom Layer w8: C28.1@521.7,1347 562,1347 562,1341 v2(547,1326) ; v3(545,1503) 566,1482 604.7,1482 C25.1@606,1480.7 ; C38.2@595,1271 C38.2@596,1270 ; C30.1@777.71,1467 778,1466.71 C31.2@778,1429 ; C31.2@779,1430 780,1429 v2(798,1429) ; v2(801.02,1504) C16.2@782,1523 820.7,1523 C15.1@821,1523.3 ; v2(802,1273) 811.65,1273 816,1268.65 C33.2@816,1251
  Bottom Layer w10: v1(994,1583) 1030,1583 1120,1493 1120,1440 1106,1426 1106,1305 1167.16,1243.84 1167.16,1178.84 1217,1129 v1(1217,961)
1.8OK: C14.1 R4.2 U1.2 | length 331.5
  Top Layer w8: C14.1@792.52,312.72 787.4,312.72 836.77,312.71 ; U1.2@816.14,542.24 816.14,516.61 796.5,496.97 796.5,408.67 823.2,381.97 823.2,326.28 836.77,312.71 ; R4.2@859.45,312.71 836.77,312.71
1.8V: C4.1 C13.1 C17.1 C21.1 C64.1 C65.1 J4.1 J5.12 U8.5 | length 1944.3
  Top Layer w4: J5.12@162.8,1271.65 172.69,1271.65 177.16,1271.65 185.04,1263.78 v2(185.04,1254.92)
  Top Layer w5: C13.1@133.86,1526.57 134.84,1527.56 v3(157.48,1527.56) ; C4.1@141.73,1113.19 142.72,1114.17 v3(163.39,1114.17) ; C64.1@407.11,1173.02 C64.1@408.09,1174 ; C64.1@408.09,1173.51 v3(430.73,1173.51) C17.1@453.37,1173.51 ; C65.1@429,1471.3 429.98,1470.32 v3(429.98,1447.68) ; C17.1@453.37,1173.02 C17.1@454.36,1174
  Top Layer w8: C21.1@101.18,931.1 101.18,884.88 U8.5@101.47,884.59
  Top Layer w10: C21.1@101.18,931.1 101.18,966.54 ; v1(101.38,1007.87) 101.18,1007.68 101.18,966.54 ; J4.1@1174.02,436.61 1072.44,436.61 907.48,271.65 469.49,271.65 219.49,521.65 219.49,930.12 183.07,966.54 101.18,966.54
3.3V: C5.1 C19.1 C34.1 C35.2 C36.2 C39.1 C40.2 C41.1 C42.2 C43.2 C44.2 C45.1 C53.1 C54.1 J4.6 L2.2 L6.2 R4.1 R5.1 R7.1 R14.2 R16.2 R19.2 R20.2 R21.2 R22.2 R23.2 R33.2 U1.3 U1.4 U2.7 U4.27 U5.5 U6.B1 U6.G1 U6.K2 U6.K7 U7.5 U8.3 U9.14 U9.34 U11.2 U11.3 X18.2 | length 3343.8
  Top Layer w5: U6.K7@634.61,1490.16 645.46,1501 v2(646,1501) ; v2(751,1502) 751,1501.72 U6.K2@762.57,1490.16 ; v2(776,1274) 776.72,1274 U6.B1@788.16,1285.43 ; U6.G1@788.16,1413.39 798,1403.54 v2(798,1403)
  Top Layer w7: U2.7@1140.75,737.2 1179.13,737.2
  Top Layer w8: v1(176.28,744) U8.3@176.28,784.2 ; v1(209.3,2051.74) C44.2@240.3,2051.74 240.53,2051.51 L6.2@286.3,2051.51 ; U1.3@835.83,542.24 835.83,514.57 847.44,502.95 855.51,502.95 ; 853.54,500.98 855.51,502.95 ; U1.4@855.51,542.24 855.51,502.95 ; v3(858,2127) 859.18,2127 867.57,2135.39 U9.34@867.57,2155.13 ; v3(1025,2453) 1025.06,2452.94 U9.14@1025.06,2420.87 ; U5.5@1143.32,1925.22 v1(1143.32,1975.99) ; 1196.85,1541.34 1204.38,1533.81 1204.38,1506.69 1206.53,1504.54 U4.27@1206.53,1445.5 ; v1(1221.82,186.71) 1221.82,200.4 1239.14,217.71 1239.14,307.05 1268.7,336.61 J4.6@1333.86,336.61 ; C19.1@1300.88,1712.11 U7.5@1300.88,1762.8
  Top Layer w10: C5.1@1183.86,819.88 v1@1183.86,862.99 ; 1300.88,1681.79 C19.1@1300.88,1712.11
  Top Layer w12: v1(875.98,1536.42) 1161.25,1536.42 1161.66,1536 1179.06,1536 1179.48,1536.42 1191.93,1536.42 1196.85,1541.34 1289.37,1633.86 v1(1289.37,1670.28) 1300.88,1681.79
  Top Layer w24: 853.54,500.98 C45.1@853.54,458.58 v1(853.54,407.28) 859.45,401.37 R4.1@859.45,366.26 ; R7.1@1069.69,611.22 1069.69,633.91 1042.02,661.57 1042.02,790.87 1056.57,805.42 1104.85,805.42 1129.46,780.81 1179.62,780.81 1183.86,776.57 ; 1179.13,737.2 1183.86,741.93 1183.86,776.57 ; C5.1@1183.86,819.88 1183.86,776.57 ; v1@1183.86,862.99 v1(1184.06,863.19)
  Bottom Layer w5: C34.1@781.57,1347.13 C34.1@781.7,1347 820.1,1347 R5.1@821,1347.9
  Bottom Layer w8: R20.2@537.4,189.66 578.44,189.66 v1(578.74,189.96) ; C42.2@646,1478 v2(646,1501) ; C41.1@646,1521.3 v2(646,1501) ; R21.2@674,2164 R33.2@712.39,2164 v1(712.39,2213.39) ; C39.1@703,1523.3 742.7,1523.3 C40.2@743,1523 751,1515 v2(751,1502) ; C35.2@776,1251 v2(776,1274) 793,1291 837.74,1291 846.46,1299.72 846.46,1355.09 799,1402.54 814,1417.54 814,1485.01 812.01,1487 ; C34.1@781.57,1347.13 C36.2@781.57,1387.8 796.77,1403 v2(798,1403) ; 826.57,1487 812.01,1487 ; v3(858,2127) 859,2128 C53.1@859,2149.3 ; v3(1025,2453) 1025,2433.7 C54.1@1032,2426.7 ; v3(1083.66,1118.11) R14.2@1083.66,1142.42 ; v3(1122.05,1118.39) 1122.68,1117.76 R16.2@1122.68,1142.42 ; v1(1161,2063) L2.2@1161,2096.23 1161.23,2096 C43.2@1209,2096 ; R19.2@1184.06,186.71 v1(1221.82,186.71) ; R22.2@1298,2514.23 1298,2480.55 v1(1298.23,2480.32) ; v1(1314,2741.12) R23.2@1314,2713 1345.5,2681.5 ; U11.3@1403.54,2661.81 1350,2661.81 1345.5,2666.31 1345.5,2681.5 ; U11.2@1403.54,2681.5 1345.5,2681.5 ; v2(646,1501) 647,1502 v2(751,1502) ; v2(751,1502) 766,1487 812.01,1487
  Bottom Layer w12: 826.57,1487 v1(875.98,1536.42)
5.5OK: R1.1 U1.1 U2.9 | length 981.5
  Top Layer w7: 887.01,287.15 1096.46,496.59 1096.46,643.7 1089.57,650.59 1089.57,676.18 1111.22,697.83 U2.9@1140.75,697.83
  Top Layer w8: R1.1@717.71,494.81 745.28,494.81 ; U1.1@796.46,542.24 796.46,524.53 766.74,494.81 745.28,494.81 ; 887.01,287.15 771.69,287.15 745.28,313.57 745.28,494.81
5.5V: C10.1 J4.3 J5.14 J5.16 R1.2 R2.1 U1.9 | length 2502.3
  Top Layer w5: 194.88,1274.61 195.87,1273.62
  Top Layer w7: 804.33,757.8 816.14,745.98 U1.9@816.14,713.5
  Top Layer w8: J5.14@162.8,1287.4 182.09,1287.4 ; J5.16@162.8,1303.15 182.09,1303.15 182.09,1287.4 ; 194.88,1274.61 182.09,1287.4
  Top Layer w12: 195.87,1273.62 204.72,1264.76 204.72,1235.24 235.5,1204.46 235.5,1174.93 466.68,943.76 794.29,943.76 ; C10.1@794.49,860.16 794.49,943.56 794.29,943.76 ; v1(1032.48,483.27) 1009.84,505.91 1009.84,890.75 956.83,943.76 794.29,943.76 ; v1(1092.52,386.81) 1092.72,386.61 J4.3@1174.02,386.61
  Top Layer w24: R1.2@717.71,548.35 717.71,584.87 660.48,584.87 641.19,604.16 641.19,840.56 656.17,855.53 728.25,855.53 745.28,838.5 728.74,821.97 R2.1@728.74,816.85
  Top Layer w30: 745.28,838.5 765.49,858.72 765.49,860.16 C10.1@794.49,860.16 794.49,827.16 804.33,817.31 804.33,757.8
  Bottom Layer w12: v1(1032.48,483.27) 1092.52,423.23 v1(1092.52,386.81)
5V: C2.1 C11.1 C18.1 C20.1 C62.1 C63.1 J4.4 L1.1 L7.1 R10.2 R13.1 TP2.TP U3.5 U4.11 U5.8 U7.1 U7.3 U8.1 U9.2 U9.7 | length 6548.6
  Top Layer w8: v1(253.65,637.1) R10.2@253.65,776.62 ; R13.1@578.74,584.84 578.74,606.3 602.36,629.92 v1(602.36,660.68) ; C2.1@993.32,2004.77 C2.1@993.54,2005 993.54,2036.42 ; U9.2@1098.87,2209.26 1254.54,2209.26 1299.21,2253.94 v1(1299.21,2309.06) ; U9.7@1098.87,2307.68 1118.61,2307.68 1120.92,2310 1194.92,2310 v1(1195.87,2309.06) ; v3(1146.65,1230.32) 1147.47,1231.13 U4.11@1147.47,1258.5 ; 1215.55,2036 1215.71,2035.84
  Top Layer w10: C20.1@86.42,732.28 86.42,740.94 101.47,756 U8.1@101.47,784.2 ; U5.8@993.32,1925.22 C2.1@993.32,2004.77 ; 993.54,2036.42 1006.34,2049.21 1136.6,2049.21 1149.82,2036 1215.55,2036 ; 1215.71,2035.84 1215.71,1954.72 ; U7.3@1226.08,1863.19 1226.08,1906.62 C18.1@1215.71,1916.99 1215.71,1954.72 ; U7.1@1300.88,1863.19 1300.88,1887.07 1302.17,1888.35 1314.33,1888.35 1330.15,1904.17 1330.15,1926.54 1301.96,1954.72 1215.71,1954.72
  Top Layer w12: C20.1@86.42,732.28 86.42,690.16 v1(86.61,689.96) ; J4.4@1333.86,386.61 1411.22,386.61 1451.77,427.17 v1(1451.77,461.61) ; v1(1400,2418) 1444.84,2462.84 C62.1@1461.67,2462.84 ; C62.1@1462.37,2462.14 L7.1@1507.9,2462.14
  Top Layer w14: 1215.55,2036 v1(1290.56,2111.01) 1400,2220.45 v1(1400,2418)
  Top Layer w24: U3.5@412.11,650.83 425.94,650.83 ; C11.1@431.8,549.46 431.8,644.98 425.94,650.83 ; L1.1@528.25,660.68 493.35,660.68 483.51,650.83 425.94,650.83
  Top Layer w30: L1.1@528.25,660.68 v1(602.36,660.68)
  Bottom Layer w8: v1@252.95,637.8 v1(253.65,637.1) ; v3(1146.65,1230.32) 1146.65,922.24 1149.61,919.29
  Bottom Layer w12: v1(86.61,689.96) 138.78,637.8 252.95,637.8 579.48,637.8 v1(602.36,660.68) 860.98,919.29 1149.61,919.29 1558.07,919.29 ; v1(1195.87,2309.06) v1(1299.21,2309.06) 1345.06,2309.06 TP2.TP@1400,2364 v1(1400,2418) ; v1(1290.56,2111.01) 1433.07,1968.5 1433.07,1865.16 1597.44,1700.79 1597.44,958.66 1558.07,919.29 ; v1(1451.77,461.61) 1558.07,567.91 1558.07,919.29
-5.5V: C8.1 C12.2 J4.8 J5.18 J5.20 R8.1 U2.2 | length 3129.3
  Top Layer w8: J5.18@162.8,1318.9 182.09,1318.9 ; J5.20@162.8,1334.65 182.09,1334.65 182.09,1318.9 ; 195.87,1310.04 187.01,1318.9 182.09,1318.9
  Top Layer w10: U2.2@1312.01,697.83 1341.58,697.83 1347.24,692.17
  Top Layer w12: 195.87,1310.04 228.35,1277.56 228.35,1243.11 257.87,1213.58 257.87,1182.09 476.38,963.58 986.22,963.58 1069.88,879.92 v1(1131.89,879.92) ; 1131.89,896.65 1391.73,896.65 1400.59,887.8 C8.1@1400.59,843.5 ; J4.8@1333.86,286.61 1412.6,286.61 1478.35,352.36 1478.35,450.01 1478.77,450.43 1478.77,526.15 v1(1463.78,541.14)
  Top Layer w16: 1229.52,584.6 R8.1@1229.52,607.28 1364.17,607.28 1443.9,687.01 1443.9,800.2 C8.1@1400.59,843.5 ; C12.2@1229.53,544.29 1229.53,584.59
  Top Layer w20: 1347.24,692.17 1356.61,682.8 1403.23,682.8 1416.61,696.17 1416.61,786.11 1403.23,799.48 1400.59,799.48 C8.1@1400.59,831.69
  Bottom Layer w12: v1(1131.89,879.92) 1131.89,877.17 1463.78,545.28 v1(1463.78,541.14)
A_OSCK: J3.1 U6.G10 | length 774
  Top Layer w5: v3(483,1473) 498.23,1473 U6.G10@557.84,1413.39
  Top Layer w6: v3(575.79,1707.68) 544.29,1739.17 544.29,1950.79 577.93,1984.43 J3.1@661.08,1984.43
  Bottom Layer w5: 465.55,1499 465.55,1490.45 v3(483,1473)
  Bottom Layer w6: 465.55,1499 465.55,1562.99 575.79,1673.23 v3(575.79,1707.68)
A_SCK: J3.9 U6.J9 | length 370.6
  Top Layer w5: v3(561,1522) 570.5,1512.5 570.5,1480.79 583.43,1467.86 U6.J9@583.43,1464.57
  Top Layer w6: v3(641.73,1651.57) 658.46,1668.31 658.46,1781.81 J3.9@661.08,1784.43
  Bottom Layer w6: v3(561,1522) 561,1570.84 v3(641.73,1651.57)
A_SD_0: J3.7 U6.H9 | length 551.8
  Top Layer w5: v3(529,1532) 529,1497.08 547.52,1478.56 560,1478.56 569.26,1469.3 569.26,1453.15 U6.H9@583.43,1438.98
  Top Layer w6: v3(636.81,1677.81) 636.81,1723.43 592.52,1767.72 592.52,1825.79 601.16,1834.43 J3.7@661.08,1834.43
  Bottom Layer w6: v3(529,1532) 529,1570 v3(636.81,1677.81)
A_SD_1: J3.5 U6.J10 | length 579.8
  Top Layer w5: v3(508,1515) 508,1498 541.43,1464.57 U6.J10@557.84,1464.57
  Top Layer w6: v3(613.19,1706.69) 613.19,1724.41 577.76,1759.84 577.76,1864.17 598.01,1884.43 J3.5@661.08,1884.43
  Bottom Layer w5: v3(508,1515) 508,1541.46
  Bottom Layer w6: 508,1541.46 508,1568.04 613.19,1673.23 v3(613.19,1706.69)
A_SD_2: J3.10 U6.K9 | length 416.1
  Top Layer w5: U6.K9@583.43,1490.16 579.5,1494.09 579.5,1516.5 v3@585,1522
  Top Layer w6: v3(767,1712.87) 820.8,1766.66 820.92,1766.66 J3.10@820.92,1784.43
  Top Layer w8: v3@585,1522 589,1526 v3(589,1527)
  Bottom Layer w6: v3(589,1527) 589,1569.31 732.55,1712.87 v3(767,1712.87)
A_SD_3: J3.8 U6.K8 | length 597.2
  Top Layer w5: v3(595,1505) 595,1504.18 U6.K8@609.02,1490.16
  Top Layer w6: v3(790,1691.57) 816.93,1718.5 856.3,1718.5 892.72,1754.92 892.72,1823.82 882.11,1834.43 J3.8@820.92,1834.43
  Bottom Layer w4: v3(595,1505) 612,1522
  Bottom Layer w6: 612,1522 612,1573.61 729.96,1691.57 v3(790,1691.57)
A_WFS: J3.3 U6.H10 | length 670.9
  Top Layer w5: v3(487,1500) 548.02,1438.98 U6.H10@557.84,1438.98
  Top Layer w6: v3(594.49,1687.99) 594.49,1715.55 560.04,1750 560.04,1901.2 593.26,1934.43 J3.3@661.08,1934.43
  Bottom Layer w6: v3(487,1500) 487,1566.72 594.49,1674.21 v3(594.49,1687.99)
CEC_CON: J1.13 U4.25 | length 464.4
  Top Layer w8: U4.25@1245.9,1445.5 1245.9,1476.21 v3(1255.91,1486.22) ; v3(1400.59,1209.65) 1414.73,1223.79 J1.13@1477.75,1223.79
  Bottom Layer w8: v3(1255.91,1486.22) 1255.91,1354.33 v3(1400.59,1209.65)
DAOUT: J3.4 U6.A5 | length 1094.8
  Top Layer w5: v3(685.8,1225) U6.A5@685.8,1259.84
  Top Layer w8: J3.4@820.92,1934.43 821.53,1935.04 885.83,1935.04 921.26,1899.61 921.26,1730.24 900.2,1709.17 900.2,1688.46 904.53,1684.13 904.53,1664.37 919.68,1649.21 919.68,1621.46 v1(902.56,1604.33)
  Bottom Layer w6: v3(685.8,1225) 739.54,1171.26 823.13,1171.26 902.56,1250.69 v1(902.56,1604.33)
DDC_CLK_CON: J1.15 U4.15 | length 292.9
  Top Layer w8: U4.15@1226.21,1258.5 1226.21,1240.33 1244.54,1222 1348.87,1222 1386.45,1184.42 J1.15@1477.75,1184.42
DDC_DAT_CON: J1.16 U4.14 | length 321.6
  Top Layer w8: U4.14@1206.53,1258.5 1206.53,1238.8 1238.33,1207 1342.65,1207 1384.92,1164.73 J1.16@1477.75,1164.73
DSI_CLK_N: J5.17 U6.C9 | length 661.2
  Top Layer w4: v2(64,1315) 74,1315 77.9,1318.9 J5.17@90.75,1318.9 ; v2(335,1317) 345,1317 349,1321 356,1321 377.98,1299.02 471,1299.02 492,1320 507,1320 527.98,1299.02 571.43,1299.02 U6.C9@583.43,1311.02
  Bottom Layer w4: v2(64,1315) 74,1315 80,1321 139.06,1321 158.06,1302 178.97,1302 193.97,1317 206,1317 218,1305 244,1305 263,1324 263,1348.56 267.89,1353.44 274.11,1353.44 279,1348.56 279,1332.91 290.91,1321 321,1321 325,1317 v2(335,1317)
DSI_CLK_P: J5.19 U6.C10 | length 658
  Top Layer w4: v2(64,1337) 74,1337 76.35,1334.65 J5.19@90.75,1334.65 ; v2(335,1337) 345,1337 349,1333 360.97,1333 382.95,1311.02 403.03,1311.02 406.23,1314.22 406.23,1318.8 409.43,1322 419.03,1322 422.23,1318.8 422.23,1314.22 425.43,1311.02 435.03,1311.02 438.23,1314.22 438.23,1318.8 441.43,1322 451.03,1322 454.23,1318.8 454.23,1314.22 457.43,1311.02 464,1311.02 484.98,1332 511.97,1332 532.95,1311.02 U6.C10@557.84,1311.02
  Bottom Layer w4: v2(64,1337) 74,1337 78,1333 144.03,1333 163.03,1314 174,1314 189,1329 210.97,1329 222.97,1317 239.03,1317 251,1328.97 251,1353.53 262.91,1365.44 279.09,1365.44 291,1353.53 291,1337.89 295.89,1333 321,1333 325,1337 v2(335,1337)